# Altium PCB gateway.PcbDoc
Units mil, origin at the board's own origin, x right, y up, seen from the top; angles counter-clockwise.
Board outline 6000 x 4000 mil, 2 copper layers (Top Layer, Bottom Layer); 114 components, 94 nets, 405 pads, 209 vias.
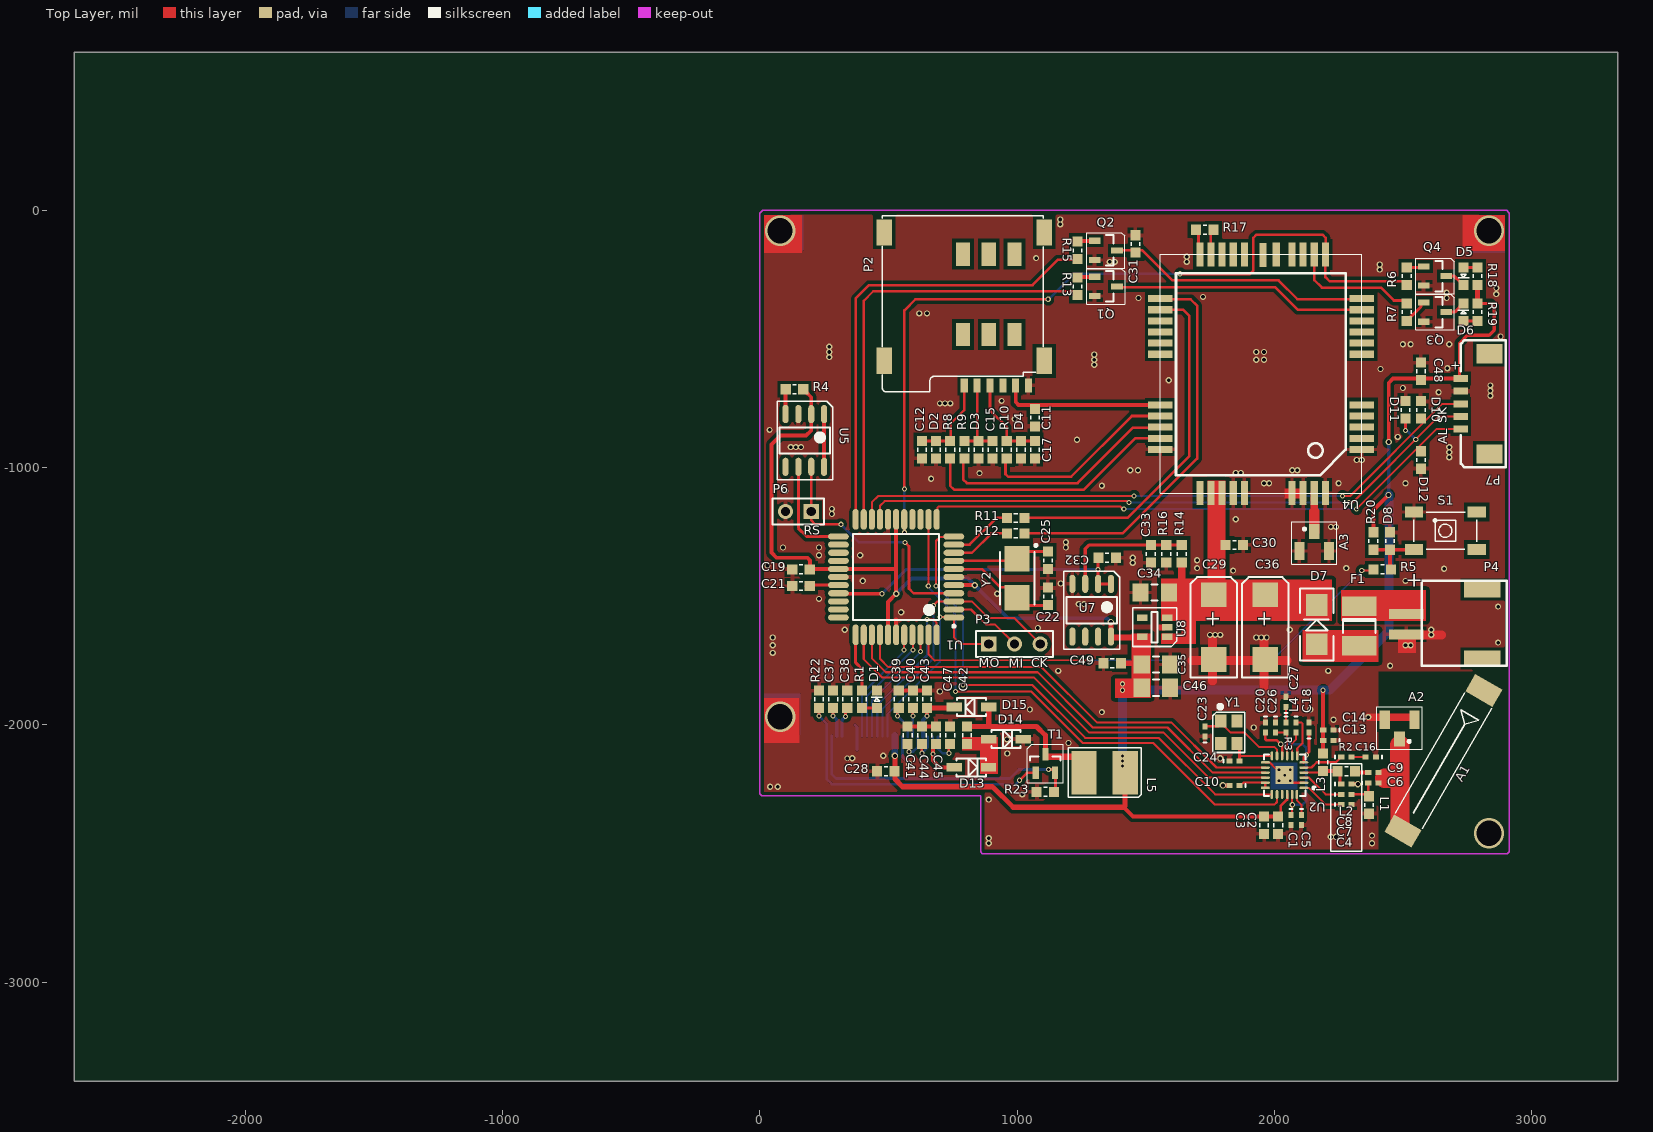
[diagram p0: Top Layer view]
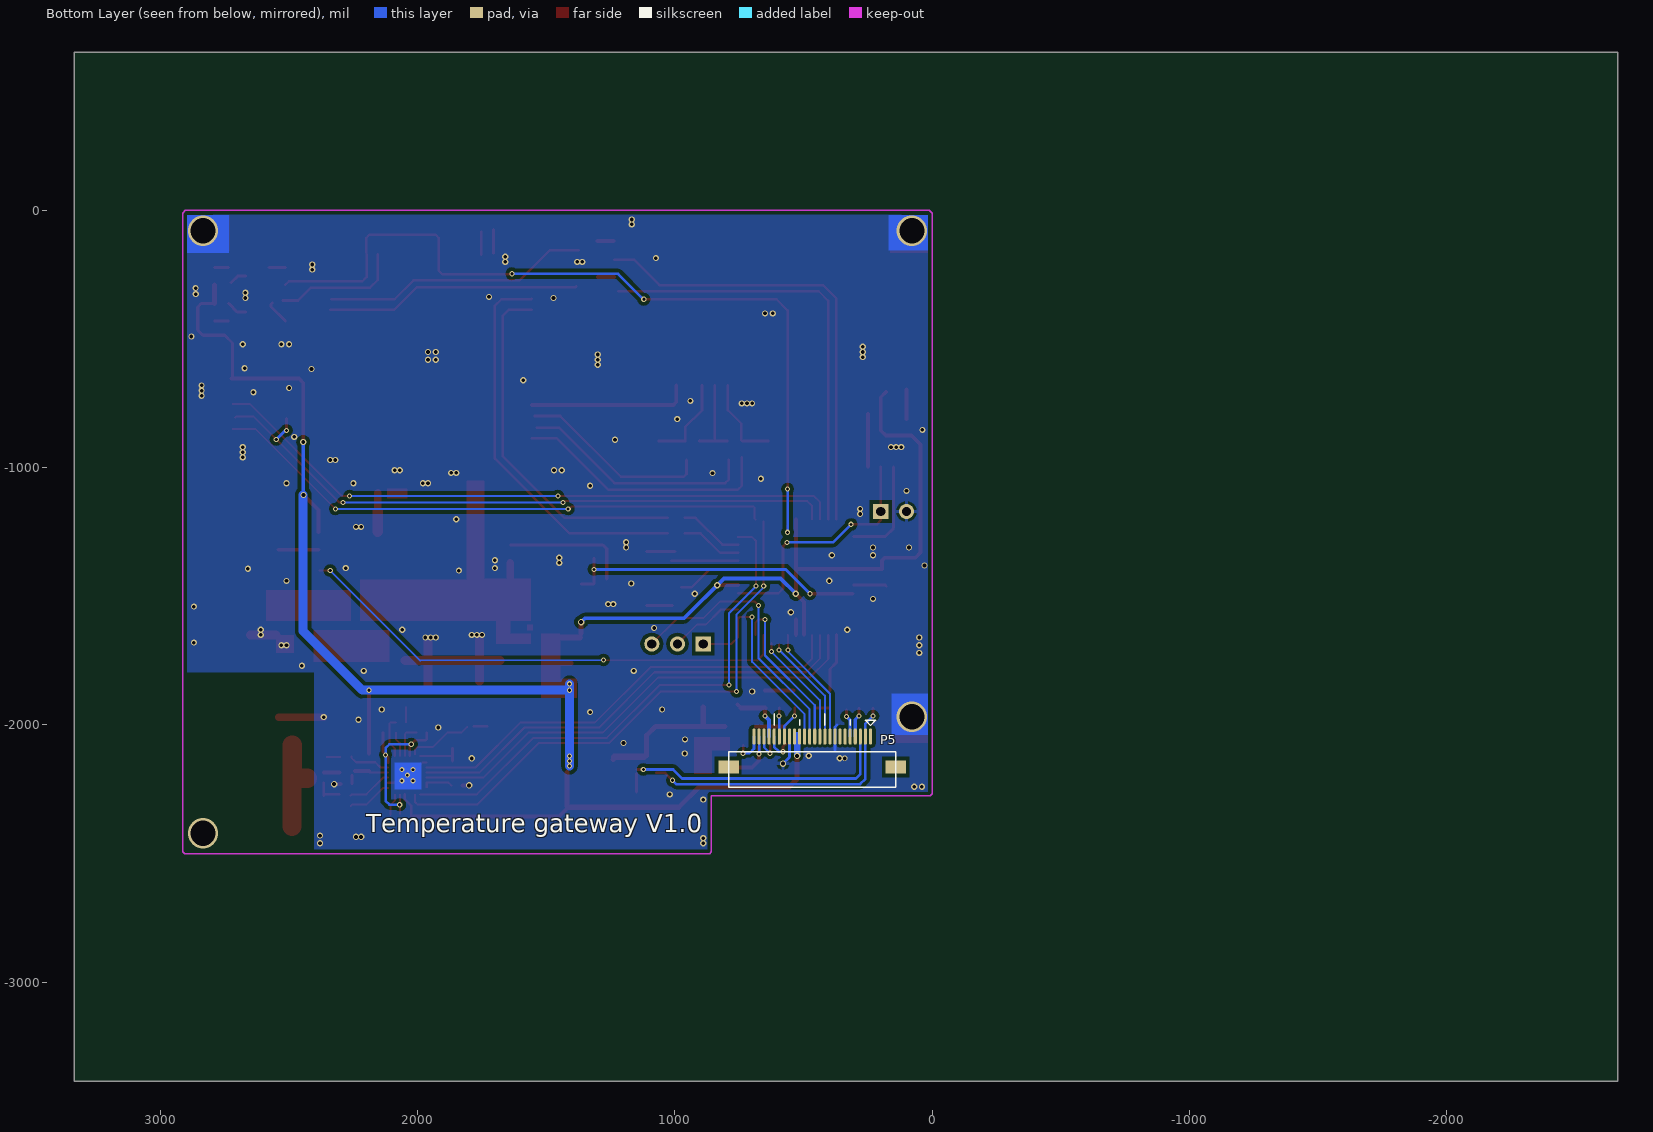
[diagram p1: Bottom Layer view, seen from below]

## Layer stack, top to bottom
Top Solder: solder mask 0.4, Solder Resist, Dk 3.5
Top Layer: signal copper 1.4
Dielectric1: dielectric 12.6, FR-4, Dk 4.8
Bottom Layer: signal copper 1.4
Bottom Solder: solder mask 0.4, Solder Resist, Dk 3.5

## Board outline
-2665,-3385 3335,-3385 3335,615 -2665,615

## Design rules (kind name [scope] priority, off if disabled: settings)
Clearance [All] p1 off: gap=12
ComponentClearance [All] p1 off: gap=10 collisioncheckmode=3 verticalgap=10 showdistances=FALSE
FabricationTestPointUsage TestPointUsage [All] p1: valid=0 allowmultiple=FALSE
FabricationTestpoint Testpoint [(IsPad And (OnTopLayer Or OnBottomLayer))] p1: side=3 testpointundercomponent=TRUE minsize=40 maxsize=100 preferedsize=60 minholesize=0 maxholesize=40 preferedholesize=32 testpointgrid=1 allowsidetop=TRUE allowsidebottom=TRUE usegrid=TRUE gridtolerance=0.01
HoleSize [All] p1: absolutevalues=TRUE maxlimit=200 minlimit=1 maxpercent=80.000 minpercent=20.000
PolygonConnect [All] p1: connectstyle=Relief reliefconductorwidth=15 reliefentries=4 polygonreliefangle="90 Angle" airgapwidth=10
RoutingVias [All] p1: holewidth=28 width=50 viastyle="Through Hole" minholewidth=10 minwidth=20 maxholewidth=200 maxwidth=300
SolderMaskExpansion [All] p1: expansion=4
Width [All] p1: maxlimit=200 minlimit=8 preferedwidth=12 minimp=50.000000 maximp=50.000000 favimp=50.000000
26 further rules are at their usual default settings.

## Components (designator, comment, footprint, x,y, rotation, side; value= is the part's Value field where it differs from the comment)
A1 "ANTA" ANTA-433 2500,-2412 r60 top
A2 "ANTA" IPEX 2487,-2008 r270 top
A3 "IPEX" IPEX 2155,-1295 r90 top
C1 "Cap" 0402-A 2065,-2370 r270 top
C2 "Cap" 0603 2015,-2390 r270 top
C3 "Cap" 0603 1960,-2390 r270 top
C4 "Cap" 0402-A 2280,-2310 r0 top
C5 "Cap" 0402-A 2105,-2370 r270 top
C6 "Cap" 0402-A 2385,-2225 r0 top
C7 "Cap" 0402-A 2280,-2270 r0 top
C8 "Cap" 0402-A 2280,-2230 r0 top
C9 "Cap" 0402-A 2385,-2185 r0 top
C10 "Cap" 0402-A 1845,-2235 r180 top
C11 "Cap" 0603 1070,-805 r90 top
C12 "Cap" 0603 630,-930 r90 top
C13 "Cap" 0402-A 2210,-2060 r180 top
C14 "Cap" 0402-A 2210,-2020 r180 top
C15 "Cap" 0603 905,-930 r270 top
C16 "Cap" 0402-A 2375,-2125 r180 top
C17 "Cap" 0603 1070,-930 r270 top
C18 "Cap" 0402-A 2135,-2010 r90 top
C19 "Cap" 0603 160,-1395 r180 top
C20 "Cap" 0402-A 1965,-2010 r270 top
C21 "Cap" 0603 160,-1460 r180 top
C22 "Cap" 0603 1120,-1500 r90 top
C23 "Cap" 0402-A 1730,-2025 r90 top
C24 "Cap" 0402-A 1845,-2140 r0 top
C25 "Cap" 0603 1120,-1360 r270 top
C26 "Cap" 0402-A 2005,-2010 r270 top
C27 "Cap" 0402-A 2045,-1910 r90 top
C28 "Cap" 0603 490,-2180 r0 top
C29 "Cap Pol3" C7343 1765,-1620 r270 top
C30 "Cap" 0603 1845,-1300 r180 top
C31 "Cap" 0603 1460,-130 r90 top
C32 "Cap" 0603 1350,-1350 r180 top
C33 "Cap" 0603 1520,-1335 r270 top
C34 "Cap" 3216[1206] 1535,-1485 r180 top
C35 "Cap" 3216[1206] 1540,-1765 r0 top
C36 "Cap Pol3" C7343 1965,-1620 r270 top
C37 "Cap" 0603 285,-1900 r270 top
C38 "Cap" 0603 340,-1900 r270 top
C39 "Cap" 0603 540,-1900 r270 top
C40 "Cap" 0603 595,-1900 r270 top
C41 "Cap" 0603 574.65,-2040 r270 top
C42 "Cap" 0603 805,-2040 r270 top
C43 "Cap" 0603 650,-1900 r270 top
C44 "Cap" 0603 630,-2040 r270 top
C45 "Cap" 0603 685,-2040 r270 top
C46 "Cap" 3216[1206] 1540,-1855 r0 top
C47 "Cap" 0603 740,-2040 r270 top
C48 "Cap" 0603 2570,-625 r270 top
C49 "Cap" 0603 1370,-1760 r180 top
D1 "TEST" 0603-LED 455,-1900 r90 top
D2 "RL0603E012M100K" 0603 685,-930 r270 top
D3 "RL0603E012M100K" 0603 850,-930 r270 top
D4 "RL0603E012M100K" 0603 1015,-930 r270 top
D5 "WORK" 0603-LED 2735,-255 r270 top
D6 "LINK" 0603-LED 2735,-395 r90 top
D7 "SS54" SMA 2165,-1610 r90 top
D8 "RL0603E012M100K" 0603 2450,-1285 r90 top
D10 "RL0603E012M100K" 0603 2570,-775 r90 top
D11 "RL0603E012M100K" 0603 2510,-775 r90 top
D12 "RL0603E012M100K" 0603 2570,-970 r270 top
D13 "MBR0503" SOD-123 755,-2165 r90 top
D14 "MBR0503" SOD-123 890,-2055 r90 top
D15 "MBR0503" SOD-123 890,-1930 r270 top
F1 "Fuse Thermal" 1812 2330,-1615 r270 top
L1 "Inductor" 0603 2368,-2311 r270 top
L2 "Inductor" 0603 2280,-2180 r0 top
L3 "Inductor" 0603 2190,-2145 r90 top
L4 "Inductor" 0402-A 2085,-2010 r270 top
L5 "Inductor" L-CD43 1340,-2185 r180 top
P2 "MircoSIM" "MICRO SIM" 990,-170 r180 top
P3 "Header 3" HDR1X3 890,-1685 r0 top
P4 "POW" HY2.0-2P 2513,-1569 r270 top
P5 "Header 24" FPC-24 240,-2045 r180 bottom locked
P6 "Header 2" HDR1X2 200,-1170 r180 top
P7 "TEMP" 1.25-5P 2725,-850 r90 top
Q1 "NPN" SOT-23-NPN 1345,-295 r270 top
Q2 "NPN" SOT-23-NPN 1345,-155 r270 top
Q3 "NPN" SOT-23-NPN 2625,-255 r270 top
Q4 "NPN" SOT-23-NPN 2625,-395 r270 top
R1 "Res1" 0603 397.48,-1900 r270 top
R2 "Res1" 0402-A 2280,-2125 r0 top
R3 "Res1" 0402-A 2045,-2010 r270 top
R4 "Res1" 0603 135,-695 r0 top
R5 "Res1" 0603 2420,-1395 r180 top
R6 "Res1" 0603 2515,-255 r90 top
R7 "Res1" 0603 2515,-395 r270 top
R8 "Res1" 0603 740,-930 r270 top
R9 "Res1" 0603 795,-930 r270 top
R10 "Res1" 0603 960,-930 r270 top
R11 "Res1" 0603 995,-1195 r180 top
R12 "Res1" 0603 995,-1255 r180 top
R13 "Res1" 0603 1235,-295 r270 top
R14 "Res1" 0603 1640,-1335 r270 top
R15 "Res1" 0603 1235,-155 r270 top
R16 "Res1" 0603 1580,-1335 r90 top
R17 "Res1" 0603 1730,-75 r0 top
R18 "Res1" 0603 2790,-255 r90 top
R19 "Res1" 0603 2790,-395 r270 top
R20 "Res1" 0603 2385,-1285 r270 top
R22 "Res1" 0603 230,-1900 r90 top
R23 "Res1" 0603 1110,-2260 r180 top
S1 "SW-PB" SW1 2665,-1245 r0 top
T1 "Si1304" SOT-23-NMOS 1110,-2150 r90 top
U1 "ATmega16" 44A_M 530,-1425 r180 top
U2 "A7139" QFN24N 2040,-2195 r180 top
U4 "G3524" G3524 1925,-870 r180 top
U5 "IMP706" SOIC8 175,-895 r270 top
U7 "LM358D" SOIC8 1290,-1555 r270 top
U8 "XC6219B30" SOT23-5N 1535,-1620 r180 top
Y1 "12.8M" XT3225 1855,-1985 r270 top
Y2 "XTAL" XT5032 1000,-1430 r270 top

## Footprints (in the part's own frame and the unit in brackets; to place one, negate y for a bottom-side part, rotate by r counter-clockwise, add the part's x,y. Pads: shape width x height; smd on the part's side, far side on the other; paste and mask are expansions set on the pad)
1.25-5P [mm]
  rect 1.9x2.6 smd: 0(-2.45,-2.835) 0(7.45,-2.835)
  rect 0.7x1.4 smd: 1(0,0) 2(1.25,0) 3(2.5,0) 4(3.75,0) 5(5,0)
  silkscreen extent -3.78,-4.44 8.79,0
44A_M [mm] "44-Pin Thin Quad Flat Pack 0.8 mm Pitch, IPC Low Density"
  oval 2.05x0.6 smd: 1(-5.7,4) 2(-5.7,3.2) 3(-5.7,2.4) 4(-5.7,1.6) 5(-5.7,0.8) 6(-5.7,0) 7(-5.7,-0.8) 8(-5.7,-1.6) 9(-5.7,-2.4) 10(-5.7,-3.2) 11(-5.7,-4) 23(5.7,-4) 24(5.7,-3.2) 25(5.7,-2.4) 26(5.7,-1.6) 27(5.7,-0.8) 28(5.7,0) 29(5.7,0.8) 30(5.7,1.6) 31(5.7,2.4) 32(5.7,3.2) 33(5.7,4)
  oval 0.6x2.05 smd: 12(-4,-5.7) 13(-3.2,-5.7) 14(-2.4,-5.7) 15(-1.6,-5.7) 16(-0.8,-5.7) 17(0,-5.7) 18(0.8,-5.7) 19(1.6,-5.7) 20(2.4,-5.7) 21(3.2,-5.7) 22(4,-5.7) 34(4,5.7) 35(3.2,5.7) 36(2.4,5.7) 37(1.6,5.7) 38(0.8,5.7) 39(0,5.7) 40(-0.8,5.7) 41(-1.6,5.7) 42(-2.4,5.7) 43(-3.2,5.7) 44(-4,5.7)
  silkscreen extent -5.82,-4.25 4.25,4.97, body extent -5,-5 5,5, height 1.2
0402-A [mm] "Chip Inductor; Body 1 x 0.5 mm (LxW typ)"
  rect 0.6x0.5 smd: 1(-0.5,0) 2(0.5,0)
  silkscreen extent -1.1,-0.15 -1.1,0.15
0603 [mm]
  rect 1x1 smd: 1(-0.864,0) 2(0.864,0)
  silkscreen extent -0.18,-0.43 0.18,0.43
0603-LED [mm]
  rect 1x1 smd: 1(-0.864,0) 2(0.864,0)
  silkscreen extent -0.18,-0.51 0.18,0.56
1812 [mm] "Chip Capacitor; Body 4.5 x 3.2 mm (LxW typ)"
  rect 1.9x3.4 smd: 1(-1.95,0) 2(1.95,0)
  silkscreen extent -0.7,-1.6 0.7,1.6
3216[1206] [mm] "Chip Resistor; Body 3.2 x 1.6 mm (LxW typ)"
  rect 1.6x1.8 smd: 1(-1.4,0) 2(1.4,0)
  silkscreen extent -0.3,-0.8 0.3,0.8
ANTA-433 [mm]
  rect 2x3.1 smd: 1(0,0) 2(16,0)
  silkscreen extent 1.14,-1.52 14.86,1.52
C7343 [mm] "Molded Capacitor, 2-Leads, Body 7.3x4.3mm, IPC Medium Density"
  rect 2.45x2.5 smd: 1(-3.2,0) 2(3.2,0)
  silkscreen extent -4.95,-2.29 4.95,2.29, body extent -3.75,-2.25 3.75,2.25, height 4.3
FPC-24 [mm]
  rect 2x1.3 smd: 0(-14,-3) 0(2.5,-3)
  oval 0.3x1.6 smd: 1(0,0) 2(-0.5,0) 3(-1,0) 4(-1.5,0) 5(-2,0) 6(-2.5,0) 7(-3,0) 8(-3.5,0) 9(-4,0) 10(-4.5,0) 11(-5,0) 12(-5.5,0) 13(-6,0) 14(-6.5,0) 15(-7,0) 16(-7.5,0) 17(-8,0) 18(-8.5,0) 19(-9,0) 20(-9.5,0) 21(-10,0) 22(-10.5,0) 23(-11,0) 24(-11.5,0)
  silkscreen extent -14,-5 2.5,2.23
G3524 [mm]
  rect 2.4x0.7 smd: 1(-10.55,1.5) 2(-10.55,0.4) 3(-10.55,-0.7) 4(-10.55,-1.8) 5(-10.55,-2.9) 6(-10.55,-7.9) 7(-10.55,-9) 8(-10.55,-10.1) 9(-10.55,-11.2) 10(-10.55,-12.3) 11(-10.55,-13.4) 21(9.35,-13.4) 22(9.35,-12.3) 23(9.35,-11.2) 24(9.35,-10.1) 25(9.35,-9) 26(9.35,-7.9) 27(9.35,-2.9) 28(9.35,-1.8) 29(9.35,-0.7) 30(9.35,0.4) 31(9.35,1.5)
  rect 0.7x2.4 smd: 12(-6.95,-17.75) 13(-5.85,-17.75) 14(-4.75,-17.75) 15(-3.65,-17.75) 16(1.05,-17.75) 17(2.15,-17.75) 18(3.25,-17.75) 19(4.35,-17.75) 20(5.45,-17.75) 32(5.45,5.8) 33(4.35,5.8) 34(3.25,5.8) 35(2.15,5.8) 36(1.05,5.8) 37(-3.65,5.8) 38(-4.75,5.8) 39(-5.85,5.8) 40(-6.95,5.8) 41(-2.1,-17.75) 42(-0.8,-17.7)
  silkscreen extent -10.55,-17.8 9.35,5.8
HDR1X2 [mm] "Connector; Header; 2 Position"
  rect 1.5x1.5 hole 0.9: 1(0,0)
  round 1.5 hole 0.9: 2(2.54,0)
  silkscreen extent -1.27,-1.27 3.81,1.27
HDR1X3 [mm] "Connector; Header; 3 Position"
  rect 1.5x1.5 hole 0.9: 1(0,0)
  round 1.5 hole 0.9: 2(2.54,0) 3(5.08,0)
  silkscreen extent -1.27,-1.27 6.35,1.27
HY2.0-2P [mm]
  rect 1.5x3.6 smd: 0(-2.413,7.493) 0(4.369,7.493)
  rect 1x3.4 smd: 1(0,0) 2(2,0)
  silkscreen extent -3.3,1.52 5.08,9.91
IPEX [mil] "SOT23, 3-Leads, Body 3.0x2.6mm (max), Pitch 0.95mm, IPC Medium Density"
  rect 59.06x41.34 smd: 1(46.5,-0.5)
  rect 70.87x39.37 smd: 2(-28.5,57.5) 3(-28.5,-57.5)
  silkscreen extent -80,-89 86,88
L-CD43 [mm]
  rect 2.5x4.3 smd: 1(-2.032,0) 2(2.032,0)
  silkscreen extent -3.61,-2.44 3.58,2.44
"MICRO SIM" [mm]
  rect 1.55x2.6 smd: 0(-2.95,10.53) 0(-2.95,-2.15) 0(12.85,10.53) 0(12.85,-2.15)
  rect 1.4x2.3 smd: 0(0,7.92) 0(0,0) 0(2.54,7.92) 0(2.54,0) 0(5.08,7.92) 0(5.08,0)
  rect 0.7x1.35 smd: 1(-0.12,12.955) 2(2.42,12.955) 3(4.96,12.955) 5(-1.39,12.955) 6(1.15,12.955) 7(3.69,12.955)
  silkscreen extent -2.82,-3.82 13.05,13.58
QFN24N [mm] "QFN, 24-Leads, Body 4.1x4.1mm (max), Pitch 0.50mm, IPC Medium Density"
  oval 0.889x0.25 smd: 1(-1.905,1.25) 2(-1.905,0.75) 3(-1.905,0.25) 4(-1.905,-0.25) 5(-1.905,-0.75) 6(-1.905,-1.25) 13(1.905,-1.25) 14(1.905,-0.75) 15(1.905,-0.25) 16(1.905,0.25) 17(1.905,0.75) 18(1.905,1.25)
  oval 0.25x0.889 smd: 7(-1.25,-1.905) 8(-0.75,-1.905) 9(-0.25,-1.905) 10(0.25,-1.905) 11(0.75,-1.905) 12(1.25,-1.905) 19(1.25,1.905) 20(0.75,1.905) 21(0.25,1.905) 22(-0.25,1.905) 23(-0.75,1.905) 24(-1.219,1.905)
  rect 1.8x1.8 smd: 25(0,0)
  silkscreen extent -3.03,-2.05 2.05,2.05, body extent -2.05,-2.05 2.05,2.05, height 0.8
SMA [mm] "Molded Diode, 2-Leads, Body 4.3x2.7mm, IPC Medium Density"
  rect 2.15x2.15 smd: 1(-1.93,0) 2(1.93,0)
  silkscreen extent -3.56,-1.65 3.56,1.65, body extent -2.28,-1.42 2.29,1.42, height 2.95
SOD-123 [mm]
  rect 0.85x1.524 smd: 1(0,0) 2(0,-3.4)
  silkscreen extent -0.9,-3.15 0.9,-0.25
SOIC8 [mm]
  oval 1.8x0.6 smd: 1(-2.625,1.905) 2(-2.625,0.635) 3(-2.625,-0.635) 4(-2.625,-1.905) 5(2.575,-1.905) 6(2.575,-0.635) 7(2.575,0.635) 8(2.575,1.905)
  silkscreen extent -3.89,-2.74 3.84,2.77, body extent -2.03,-2.5 1.97,2.5, height 1.76
SOT23-5N [mm]
  rect 1.05x0.65 smd: 1(-1.225,0.95) 2(-1.225,0) 3(-1.225,-0.95) 4(1.225,-0.95) 5(1.225,0.95)
  silkscreen extent -2.16,-1.91 2.16,1.91, body extent -0.87,-1.5 0.88,1.5, height 1.1
SOT-23-NMOS [mm] "SOT23, 3-Leads, Body 3.0x2.6mm (max), Pitch 0.95mm, IPC Medium Density"
  rect 1.25x0.6 smd: 1(-0.925,0.95) 2(0.925,0) 3(-0.925,-0.95)
  silkscreen extent -1.91,-1.78 1.91,1.78, body extent -0.7,-1.5 0.7,1.5, height 1.1
SOT-23-NPN [mm]
  rect 0.6x1.143 smd: 1(0.95,-1.108) 2(-0.95,-1.108) 3(0,1.108)
  silkscreen extent -1.75,-1.89 1.75,1.87, body extent -1.5,-0.66 1.5,0.74, height 1.1
SW1 [mm]
  rect 1.8x1.1 smd: 1(-3.1,1.85) 2(-3.1,-1.85) 3(3.1,-1.85) 4(3.1,1.85)
  silkscreen extent -3.1,-1.85 3.1,1.85
XT3225 [mm]
  rect 1.3x1.1 smd: 1(0,-1.6) 2(2.2,-1.6) 3(2.2,0) 4(0,0)
  silkscreen extent -1.6,-2.39 3.1,0.76
XT5032 [mm]
  rect 2.5x2.45 smd: 1(-1.925,0) 2(1.925,0)
  silkscreen extent -3.37,-1.7 2.6,1.97, body extent -2.58,-1.68 2.58,1.67, height 1.6

## Part data
A1 A2: library part SMB, "SMB Straight Connector"
C1 C2 C3 C4 C5 C6 C7 C8 C9 C10 C11 C12 C13 C14 C15 C16 C17 C18 C19 C20 C21 C22 C23 C24 C25 C26 C27 C28 C30 C31 C32 C33 C34 C35 C37 C38 C39 C40 C41 C42 C43 C44 C45 C46 C47 C48 C49: "Capacitor"
C29 C36: "Polarized Capacitor (Surface Mount)"
D1 D5 D6: library part LED2, "Typical RED, GREEN, YELLOW, AMBER GaAs LED"
D2 D3 D4 D8 D10 D11 D12: library part "Diode 18TQ045", "Schottky Rectifier"
D7 D13 D14 D15: library part "Diode 1N5408", "3 Amp Medium Power Silicon Rectifier Diode"
F1: "Thermal Fuse"
P3: "Header, 3-Pin"
P4: library part "Header 2", "Header, 2-Pin"
P5: "Header, 24-Pin"
P6: "Header, 2-Pin"
P7: library part "Header 5", "Header, 5-Pin"
Q1 Q2 Q3 Q4: library part 2N5551, "NPN General Purpose Amplifier"
R1 R2 R3 R4 R5 R6 R7 R8 R9 R10 R11 R12 R13 R14 R15 R16 R17 R18 R19 R20 R22 R23: "Resistor"
S1: "Switch"
T1: library part IRF644S, "HEXFET N-Channel Power MOSFET"
U1: library part ATmega16-16AI, "8-Bit AVR Microcontroller with 16K Bytes of In-System Programmable Flash Memory"
U5: library part MAX706RCSA, "+3V Voltage Monitoring, Low-Cost, 礟 Supervisory Circuit"
U7: "Dual Low-Power Operational Amplifier"
U8: library part LP5907
Y1: library part 3225-wy
Y2: "Crystal Oscillator"

## Via types
v1: diameter 24, hole 14, Top Layer to Bottom Layer, 131 vias
v2: diameter 20, hole 12, Top Layer to Bottom Layer, 49 vias
v3: diameter 25, hole 15, Top Layer to Bottom Layer, 12 vias
v4: diameter 20, hole 10, Top Layer to Bottom Layer, tented top, 5 vias
v5: diameter 118.11, hole 98.43, Top Layer to Bottom Layer, 4 vias
v6: diameter 24, hole 15, Top Layer to Bottom Layer, 3 vias
v7: diameter 25, hole 14, Top Layer to Bottom Layer, 1 vias
v8: diameter 22, hole 15, Top Layer to Bottom Layer, 1 vias
v9: diameter 25, hole 13, Top Layer to Bottom Layer, 1 vias
v10: diameter 26, hole 14, Top Layer to Bottom Layer, 1 vias
v11: diameter 26, hole 16, Top Layer to Bottom Layer, 1 vias

## Nets (pads, with @x,y where several pads share a name; then routed paths per layer and width w, separated by ;. In a path a pad name is that pad's centre, name@x,y a point inside that pad or via, vN(x,y) a via of type N, cw(c..) or ccw(c..) an arc to the next point about the centre after c; other vN are vias at no path point)
+3V: C2.1 C3.1 C13.2 C14.2 C19.1 C28.2 C35.1 C46.1 C48.2 C49.1 L3.2 L5.1 P5.15 P5.16 P7.5 R4.2 R18.1 R19.1 R20.1 U1.5 U1.17 U1.27 U1.38 U2.22 U5.2 U7.8 U8.5 | length 8567.6
  Top Layer w10: C2.1@2025,-2355 2025,-2315 2049.84,-2290.16 U2.22
  Top Layer w12: P7.5@2720,-650 2720,-515 2750,-485 2835,-485 2855,-465 2855,-375 2841,-361 R19.1
  Top Layer w15: R4.2@180,-706 200,-726 200,-855 180,-875 80,-875 45,-910 45,-1330 65,-1350 185,-1350 195,-1360 C19.1@195,-1390 ; C19.1@195.5,-1393.5 530,-1393.5 ; U1.38 498.5,-1521.5 v10(530,-1490) U1.17 ; U1.5 v9(835,-1456.5) ; 1420,-2290 1420,-2325 1451,-2356 C2.1 ; L3.2 v2(2190,-1865) ; R20.1 2385,-1165 v6(2444.37,-1105.63) ; v6(2445,-900) 2445,-670 2461.85,-653.15 P7.5
  Top Layer w20: v11(525,-2120) 525,-2210 555,-2240 905,-2240 985,-2320 1415,-2320 1420,-2315 L5.1 ; U7.8@1365,-1645 v3(1365,-1600) ; C49.1 C35.1@1460,-1760 ; R19.1 R18.1
  Top Layer w25: U7.8@1370,-1660 1465,-1660
  Bottom Layer w15: v10(530,-1490) 590,-1430 810,-1430 965,-1585 1350,-1585 v3(1365,-1600) ; v6@2445,-1105 v6(2445,-900)
  Bottom Layer w25: v11@525,-2115 525,-2040
  Bottom Layer w35: v2(1410,-2160) v2(1410,-1840) ; v2(1410,-1865) 2215,-1865 2445,-1635 v6@2445,-1105.63
  other v2: 1410,-2140 1410,-2120
+4.2V: C29.1 C30.2 C34.1 C36.1 D7.2 R14.2 U4.33 U4.34 U8.1 U8.3 | length 101
  Top Layer w30: 1640,-1470 R14.2
ALT_116: D12.1 P7.1 U1.12 | length 2211.3
  Top Layer w8: U1.12 690,-1198.07 690,-1155 695,-1150 1400,-1150 1410,-1160 v2(1415,-1160) ; v2(2320,-1160) 2630,-850 P7.1@2720,-850
  Bottom Layer w8: v2(1415,-1160) v2(2320,-1160)
D1: R1.1 U1.34 | length 226.9
  Top Layer w12: U1.34 372.52,-1757.52 397.48,-1782.48 R1.1
DOG: U1.23 U5.6 | length 407.7
  Top Layer w12: U5.6 150,-1235 182.52,-1267.52 U1.23
E_BUSY: P5.9 U1.40 | length 463.5
  Top Layer w8: v2(560,-1708.46) 560,-1650.91 U1.40
  Bottom Layer w8: P5.9 397.48,-1877.52 560,-1715 v2(560,-1708.46)
E_CLK: P3.3 P5.13 U1.3 | length 1078.7
  Top Layer w8: v2(675,-1535) 690,-1520 743.9,-1520 U1.3@748.9,-1525 ; U1.3 824.49,-1519.49 890,-1585 990,-1585 P3.3
  Bottom Layer w8: P5.13 476.22,-1938.78 675,-1740 v2(675,-1535)
E_CS: P5.12 U1.44 | length 624.7
  Top Layer w8: v2(650,-1590) 675,-1590 687.48,-1602.48 U1.44
  Bottom Layer w8: P5.12 456.54,-1923.46 650,-1730 v2(650,-1590)
E_D/C: P5.11 U1.42 | length 441.5
  Top Layer w8: v2(625,-1715) U1.42@625,-1681.42
  Bottom Layer w8: P5.11 436.85,-1903.15 v2(625,-1715)
E_RES: P5.10 U1.41 | length 432.8
  Top Layer w8: v2(595,-1708.46) U1.41@595,-1685.91
  Bottom Layer w8: P5.10 417.17,-1886.3 v2(595,-1708.46)
E_SDI: P3.1 P5.14 U1.1 | length 840.5
  Top Layer w8: v2(700,-1580) 746.89,-1580 751.89,-1585 U1.1 754.41,-1659.41 780,-1685 865,-1685 P3.1@890,-1660
  Bottom Layer w8: P5.14 495.91,-1959.09 700,-1755 v2(700,-1580)
GDR: P5.2 R22.1 T1.1 | length 1132.4
  Top Layer w10: v2(230,-1965) R22.1 ; v2(1010,-2215) 1038.58,-2186.42 T1.1
  Bottom Layer w10: v2@230,-1960 v2(230,-1965) 259.68,-1994.68 259.68,-2209.68 280,-2230 995,-2230 v2(1010,-2215)
GIO1: U1.11 U2.19 | length 2058.4
  Top Layer w8: v2(685,-1460) 685,-1285 700,-1270 U1.11@756.89,-1270 ; v2(790,-1845) 1060,-1845 1265,-2050 1550,-2050 1770,-2270 U2.19
  Bottom Layer w8: v2(685,-1460) 790,-1565 v2(790,-1845)
GIO2: U1.13 U2.20 | length 2170.1
  Top Layer w8: v2(655,-1460) U1.13@655,-1209.61 ; v2(760,-1870) 1055,-1870 1255,-2070 1530,-2070 1769.53,-2309.53 2000.47,-2309.53 2010.47,-2299.53 U2.20
  Bottom Layer w8: v2(655,-1460) 655,-1465 760,-1570 v2(760,-1870)
GND: A2.2 A2.3 A3.2 A3.3 C1.2 C2.2 C3.2 C4.2 C5.2 C8.2 C10.2 C11.1 C12.1 C13.1 C14.1 C15.2 C16.1 C17.2 C18.2 C19.2 C20.1 C21.2 C22.2 C23.1 C24.1 C25.2 C26.1 C27.2 C28.1 C29.2 C30.1 C31.2 C32.1 C33.2 C34.2 C35.2 C36.2 C37.1 C38.1 C39.1 C40.1 C41.1 C43.1 C44.1 C45.1 C46.2 C47.1 C48.1 C49.2 D1.2 D2.2 D3.2 D4.2 D8.2 D10.2 D11.2 D12.2 D14.2 L1.2 P2.5 P4.2 P5.8 P5.17 P6.2 P7.4 Q1.1 Q2.1 Q3.1 Q4.1 R16.1 R22.2 R23.2 S1.1 U1.6 U1.18 U1.28 U1.39 U2.2 U2.13 U2.25 U4.1 U4.31 U4.35 U4.36 U4.37 U4.38 U4.40 U5.3 U7.4 U8.2 | length 1660.3
  Top Layer w8: U2.13 1981.79,-2145.79 2006,-2170 U2.25@2010,-2170
  Top Layer w9: U2.25@2040.47,-2224.53 U2.2
  Top Layer w15: C41.1 C44.1 C45.1 ; v3(1800,-2235) C10.2 ; C8.2 v3(2325,-2230)
  Top Layer w16: U1.39 530,-1590 ; C39.1 C40.1 C43.1
  Top Layer w30: v1(2365,-1969.5) A2.2@2539.5,-1969.5
  Top Layer w35: 1680,-1750 2050,-1750 ; 1760,-1830 1760,-1670 ; 1960,-1850 1960,-1670 ; P4.2@2550,-1650 2650,-1650
  Bottom Layer w12: 370,-2000 377.8,-2007.8 377.8,-2097.2 ; P5.17 554.96,-2124.96 v3(580,-2150)
  other v1: 890,-2460 2380,-2460 890,-2440 2380,-2430 890,-2290 1020,-2270 40,-2240 70,-2240 480,-2120 1200,-2070 961,-2056 1920,-2010 2230,-1980 1330,-1950 1050,-1940 2140,-1940 1160,-1790 2210,-1790 2450,-1770 50,-1720 50,-1690 2510,-1690 2530,-1690 2870,-1680 50,-1660 1930,-1660 1950,-1660 1970,-1660 1750,-1650 1770,-1650 1790,-1650 1790,-1650 2610,-1650 330,-1630 2060,-1630 2610,-1630 1081,-1623 2870,-1540 1240,-1530 1260,-1530 230,-1510 1170,-1450 2510,-1440 1840,-1400 2660,-1393 1700,-1390 2280,-1390 30,-1380 1450,-1370 1700,-1360 1450,-1350 230,-1340 90,-1310 230,-1310 1190,-1310 1190,-1290 2220,-1230 2240,-1230 1850,-1200 280,-1180 280,-1160 100,-1090 1330,-1070 1960,-1060 1980,-1060 2250,-1060 2510,-1060 666,-1043 854,-1021 1850,-1020 1870,-1020 1440,-1010 1470,-1010 2070,-1010 2090,-1010 2320,-970 2340,-970 2680,-960 2680,-940 120,-920 140,-920 160,-920 2680,-920 1233,-891 2480,-880 38,-853 991,-811 700,-750 720,-750 740,-750 940,-740 2840,-720 2638.69,-706.47 2840,-700 2500,-690 2840,-680 1590,-660 2413,-616 2673,-613 1300,-600 1300,-580 1930,-580 1960,-580 270,-570 1300,-560 270,-550 1930,-550 1960,-550 270,-530 2500,-520 2530,-520 2680,-520 2880,-490 620,-400 650,-400 1472,-340 2670,-340 1723,-336 2863,-325 2670,-320 2863.57,-301.85 2410,-230 2410,-210 1360,-200 1380,-200 1660,-200 1074,-185 1660,-180 1168,-54 1168,-35
  other v3: 2220,-2435 2240,-2435 1790,-2130 700,-1870 549,-1562 923.23,-1490 400,-1440 390,-1340
  other v4: 2018.35,-2216.65 2061.65,-2216.65 2040,-2195 2018.35,-2173.35 2061.65,-2173.35
  other v5: 78.74,-1968.5 78.74,-78.74 2834.65,-78.74
  other v6: 962,-2111
  other v7: 360,-2130
  other v8: 340,-2130
GSM_PW: R13.2 U1.21 | length 1680.9
  Top Layer w10: U1.21 404.02,-350.98 441,-314 R13.2@1220,-314
GSM_RST: R15.2 U1.22 | length 1783.9
  Top Layer w10: U1.22 372.52,-342.48 425,-290 1060,-290 1158,-192 R15.2@1236,-192
GSM_RX: R12.2 U1.9 | length 237.9
  Top Layer w10: U1.9 824.49,-1330.51 900,-1255 R12.2
GSM_TX: R11.2 U1.10 | length 249.7
  Top Layer w10: U1.10 815.98,-1299.02 920,-1195 R11.2
HLT_CTL: P5.1
LINK_LED: Q4.2 R7.2 | length 93.9
  Top Layer w12: R7.2 2570,-374 2570,-365 Q4.2@2565,-360
MISO: P3.2 U1.2 | length 291.1
  Top Layer w8: U1.2 820.98,-1550.98 880,-1610 915,-1610 P3.2
NetA1_1: A1.1 A2.1 C6.2 C9.2 | length 382.3
  Top Layer w74.8: 2428.31,-2207 2488,-2207 A2.1@2488,-2078 ; 2473,-2207 2489,-2223 A1.1@2489,-2394
NetA3_1: A3.1 U4.39 | length 150.2
  Top Layer w30: 2155.31,-1170 U4.39
  Top Layer w40: 2155.31,-1170 2155.31,-1248.32 A3.1
NetC4_1: C4.1 U2.1 | length 174.6
  Top Layer w8: U2.1 2134.21,-2244.21 2200,-2310 2255.31,-2310 C4.1@2260.31,-2315
NetC5_1: C5.1 U2.24 | length 87.4
  Top Layer w8: U2.24 2088,-2293 2105,-2310 C5.1
NetC6_1: C6.1 C7.2 L1.1 | length 106.3
  Top Layer w10: C7.2@2304.69,-2270 L1.1@2361,-2270 ; L1.1@2365,-2275 C6.1@2365,-2225
NetC7_1: C7.1 U2.3 | length 174.4
  Top Layer w8: U2.3 2134.84,-2204.84 2200,-2270 2255.31,-2270 C7.1@2260.31,-2275
NetC8_1: C8.1 L2.1 L3.1 U2.4 | length 165.7
  Top Layer w8: U2.4 L3.1@2190,-2185.16
  Top Layer w12: C8.1@2255.31,-2230 L2.1@2255.31,-2194.32
  Top Layer w15: L3.1 L2.1@2245,-2179
NetC9_1: C9.1 L2.2 | length 61.3
  Top Layer w15: L2.2@2304,-2185 C9.1
NetC10_1: C10.1 U2.17 U2.18 | length 99.7
  Top Layer w8: C10.1@1869.69,-2235 1880.16,-2224.53 U2.17
NetC16_2: C16.2 R2.2 | length 55.6
  Top Layer w8: R2.2 C16.2
NetC21_1: C21.1 U1.29 | length 128
  Top Layer w10: C21.1@179,-1460 C21.1@182.5,-1456.5
  Top Layer w12: C21.1@182.5,-1456.5 U1.29
NetC22_1: C22.1 U1.7 Y2.2 | length 327.5
  Top Layer w10: U1.7@777.28,-1395 778.28,-1394 864,-1394 935,-1465 Y2.2@975,-1465
  Top Layer w12: Y2.2@1010,-1535 C22.1@1110,-1535
NetC23_2: C23.2 U2.11 Y1.1 | length 310.4
  Top Layer w8: Y1.1@1807.5,-2007.5 1830,-2030 1885,-2030 1940,-2085 2000,-2085 2010,-2095 U2.11@2010,-2114.29
  Top Layer w10: C23.2 Y1.1@1782.32,-2005.31
NetC24_2: C24.2 U2.12 Y1.3 | length 176.1
  Top Layer w8: 1864.69,-2120 U2.12
  Top Layer w10: C24.2 1864.69,-2120 Y1.3@1864.69,-2090
NetC25_1: C25.1 U1.8 Y2.1 | length 370
  Top Layer w10: U1.8@754,-1362 Y2.1@1014,-1362
  Top Layer w12: Y2.1@1000,-1325 C25.1@1110,-1325
NetC26_2: C26.2 R3.2 U2.9 | length 125.5
  Top Layer w8: C26.2 R3.2 ; U2.9 R3.2@2049.84,-2034.53
NetC27_1: C27.1 R3.1 | length 60.6
  Top Layer w8: R3.1 C27.1
NetC31_1: C31.1 Q2.3 U4.11 | length 1040.1
  Top Layer w10: Q2.3@1373.64,-155 1487,-155 1604,-272 2017,-272 2090,-345 U4.11@2335,-345
NetC33_1: C33.1 R14.1 R16.2 U7.3 | length 497.4
  Top Layer w12: U7.3@1265,-1431.64 1265,-1315 1279,-1301 C33.1 R16.2 R14.1
NetC39_2: C39.2 P5.18 | length 127.4
  Top Layer w10: v2(535,-1965) C39.2@535,-1934
  Bottom Layer w10: v2(535,-1965) 574.65,-2004.65 P5.18
NetC42_1: C42.1 D15.1 L5.2 T1.2 | length 604.7
  Top Layer w20: C42.1 1076,-2006 1110,-2040 T1.2@1110,-2120 ; 890,-2000 D15.1 ; L5.2@1226.42,-2120 L5.2@1240,-2133.58
  Top Layer w25: T1.2@1119.58,-2123 L5.2@1236,-2123
NetC42_2: C42.2 D13.2 D14.1
NetD1_1: D1.1 R1.2 | length 57.5
  Top Layer w10: R1.2 D1.1
NetD5_1: D5.1 R18.2 | length 55
  Top Layer w12: D5.1 R18.2
NetD5_2: D5.2 Q3.3 | length 66.7
  Top Layer w12: Q3.3 2700,-255 D5.2@2725,-280
NetD6_1: D6.1 R19.2 | length 55
  Top Layer w12: D6.1 R19.2
NetD6_2: D6.2 Q4.3 | length 80.4
  Top Layer w12: Q4.3 2701,-395 D6.2
NetD7_1: D7.1 F1.2
NetD8_1: D8.1 R5.1 R20.2 S1.2 | length 230.4
  Top Layer w8: S1.2@2541.79,-1319 S1.2
  Top Layer w15: R20.2 D8.1 ; R5.1@2450,-1391 D8.1 ; S1.2@2541.79,-1319 D8.1
NetL4_1: L4.1 U2.7 | length 160.6
  Top Layer w8: L4.1 2105.31,-1990.32 2110,-1995 2110,-2070 2089.21,-2090.79 U2.7
NetL4_2: L4.2 U2.8 | length 96.7
  Top Layer w8: U2.8 2069.53,-2070.47 2085,-2055 L4.2
NetQ1_2: Q1.2 R13.1 | length 63
  Top Layer w15: R13.1@1237,-258 Q1.2@1299.96,-258
NetQ1_3: Q1.3 U4.10 | length 994.9
  Top Layer w10: Q1.3@1383,-295 1387,-299 2004,-299 2090.75,-385.75 U4.10
NetQ2_2: Q2.2 R15.1 | length 63
  Top Layer w15: R15.1@1238.04,-119 Q2.2@1301,-119
NetR2_1: R2.1 U2.5 | length 163.5
  Top Layer w8: U2.5 2144.53,-2165.47 2165,-2145 2240,-2145 2257.66,-2127.34 R2.1@2257.66,-2122.34
NetR4_1: R4.1 U5.4 | length 116.4
  Top Layer w15: U5.4@100,-811.36 R4.1@100,-695
NetR7_1: R7.1 U4.13 | length 501.8
  Top Layer w10: U4.13 2155.31,-270.31 2185,-300 2415,-300 2465,-350 R7.1@2525,-350
NetR8_2: R8.2 U4.30 | length 1015.1
  Top Layer w10: R8.2@740,-960 740,-1070 755,-1085 1260,-1085 1460,-885 U4.30@1556,-885
NetR9_2: R9.2 U4.29 | length 918.7
  Top Layer w10: R9.2@790,-970 790,-1045 805,-1060 1235,-1060 1451,-844 U4.29@1538,-844
NetR10_2: R10.2 U4.28 | length 747.9
  Top Layer w10: R10.2@955,-970 955,-1025 965,-1035 1210,-1035 1446,-799 U4.28@1546,-799
NetR11_1: R11.1 U4.22 | length 1408.6
  Top Layer w10: R11.1 1430,-1195 1670,-955 1670,-410 1645.75,-385.75 U4.22
NetR12_1: R12.1 U4.21 | length 1540.6
  Top Layer w10: R12.1 1410,-1255 1700,-965 1700,-370 1675,-345 1559.45,-345 U4.21
NetR17_1: R17.1 U4.20 | length 92.2
  Top Layer w10: U4.20@1705.43,-166.18 R17.1@1705.43,-74
NetU5_1: U5.1 U5.8 | length 204.7
  Top Layer w15: U5.8 U5.1
PREVGH: C43.2 D15.2 P5.21 | length 229.7
  Top Layer w15: v2(650,-1965) C43.2 ; D15.2@742.14,-1934 D15.2@756.14,-1920
  Top Layer w20: C43.2 D15.2@742.14,-1934
  Bottom Layer w15: P5.21 633.7,-1981.3 v2(650,-1965)
PREVGL: C45.2 D13.1 P5.23 | length 208.3
  Top Layer w15: C45.2@673.07,-2085.93 673.07,-2138.07 700,-2165 D13.1@750,-2165
  Bottom Layer w10: v2(673.07,-2113.07) P5.23
RESE: P5.3 R23.1 T1.3 | length 1110
  Top Layer w10: v2@1122,-2173 T1.3@1147.4,-2173
  Top Layer w12: R23.1@1149,-2260 T1.3@1149,-2189.82
  Bottom Layer w10: P5.3@279,-2043 279.02,-2045 279.37,-2083 279.37,-2191.37 296,-2208 972,-2208 1007,-2173 v2@1124,-2173
  other v2: 1123,-2173
RST: P6.1 U1.4 U5.7 | length 973.2
  Top Layer w10: U5.7 200,-1205 215,-1220 v2(315,-1220) ; v2@565.5,-1291.5 580,-1306 580,-1470 597.99,-1487.99 U1.4
  Bottom Layer w10: v2(315,-1220) 385,-1290 v2@563,-1290
  other v2: 564,-1290
SCK_116: D11.1 P7.2 U1.19 | length 2545.6
  Top Layer w8: U1.19 467.01,-1147.99 485,-1130 1425,-1130 v2(1435,-1135) ; v2(2290,-1135) 2305,-1135 2640,-800 2705,-800 P7.2@2710,-805
  Top Layer w12: v2(2510,-855) D11.1
  Bottom Layer w8: v2(1435,-1135) v2(2290,-1135) ; v2(2510,-855) v2@2515,-855
  Bottom Layer w12: v2@2515,-855 v2(2550,-890)
SCK_7139: U1.36 U2.15 | length 1804.8
  Top Layer w8: U1.36 435.51,-1740.51 490,-1795 1080,-1795 1295,-2010 1585,-2010 1760.16,-2185.16 U2.15
SCS_7139: U1.37 U2.14 | length 1766
  Top Layer w8: U1.37 467.01,-1742.01 500,-1775 1095,-1775 1310,-1990 1600,-1990 1775.47,-2165.47 U2.14
SDA_116: D10.1 P7.3 U1.20 | length 2509.2
  Top Layer w8: U1.20 435.51,-1134.49 460,-1110 v2(1455,-1110) ; v2(2265,-1110) 2295,-1110 2653.43,-751.57 P7.3@2720,-751.57
  Bottom Layer w8: v2(1455,-1110) v2(2265,-1110)
SDA_7139: U1.35 U2.16 | length 1846.5
  Top Layer w8: U1.35 404.02,-1744.02 475,-1815 1065,-1815 1280,-2030 1570,-2030 1744.84,-2204.84 U2.16
SIM_CLK: C12.2 D2.1 P2.3 R8.1 | length 338.8
  Top Layer w10: R8.1@742,-893 742,-829 794.72,-776.28 P2.3
  Top Layer w12: C12.2@636,-896 R8.1
SIM_DAT: C15.1 D3.1 P2.7 R9.1 | length 321.1
  Top Layer w10: D3.1@844.72,-890.72 P2.7
  Top Layer w12: R9.1 D3.1 904,-896 C15.1@905,-895
SIM_RST: C17.1 D4.1 P2.2 R10.1 | length 346
  Top Layer w10: P2.2 894.72,-776.72 960,-842 R10.1@960,-895
  Top Layer w12: R10.1 C17.1@1064,-896
STAT: R6.1 U1.16 U4.12 | length 3205
  Top Layer w10: U1.16@561.5,-1223 561.5,-1251 v2(562,-1251) ; v2(562,-1083) 562,-388 605,-345 v2@1123,-345 ; v2@1636,-248 1904,-248 1919,-233 1919,-106 1931,-94 2187,-94 2200,-107 U4.12@2200,-162 ; U4.12 2198.62,-258.62 2215,-275 2501,-275 R6.1
  Bottom Layer w10: v2@562,-1252 v2@562,-1081 ; v2@1121.5,-345.5 1221,-246 v2@1633,-246
  other v2: 1121,-345 1634,-246
SW1: R5.2 U1.43 | length 1956.5
  Top Layer w8: U1.43 655.98,-1725.98 680,-1750 v2(1277.59,-1746.94) ; v2(2340,-1400) R5.2@2381,-1400
  Bottom Layer w8: v2(1277.59,-1746.94) 1990,-1750 v2(2340,-1400)
TSCL: P5.6
TSDA: P5.7
VCOM: C47.2 P5.24 | length 127.6
  Top Layer w10: v2(735,-2110) C47.2@735,-2079
  Bottom Layer w10: P5.24 692.76,-2091.81 710.94,-2110 v2(735,-2110)
VDA: C1.1 C18.1 C20.2 U2.6 U2.10 U2.23 | length 713.3
  Top Layer w8: C1.1@2069.53,-2345.79 U2.23
  Top Layer w10: C20.2 1965,-2055 1970,-2060 2010,-2060 2030.16,-2080.16 U2.10 ; U2.6 2115,-2125 2135,-2105 C18.1
  Bottom Layer w10: v2(2025,-2075) 2110,-2075 2125,-2090 2125,-2295 2110,-2310 v2(2070,-2310)
  other v2: 2125,-2116.27
VDD3.0: R17.2 U4.19 | length 89.2
  Top Layer w10: U4.19 R17.2@1753.74,-82
VGH: C38.2 P5.5 | length 109.2
  Top Layer w12: v2(332.5,-1967.5) C38.2@332.5,-1941.5
  Bottom Layer w12: P5.5 318.74,-1981.26 v2(332.5,-1967.5)
VGL: C37.2 P5.4 | length 116.8
  Top Layer w12: v2(285,-1965) C37.2
  Bottom Layer w12: v2(285,-1965) 299.06,-1979.06 P5.4
VIN: F1.1 P4.1
VPP: C40.2 P5.19 | length 111.3
  Top Layer w10: v2(595,-1965) C40.2
  Bottom Layer w10: P5.19 595,-2044.33 v2(595,-1965)
VSA: C32.2 U1.30 U7.1 U7.2 | length 1197.4
  Top Layer w12: U1.30@307.6,-1490 v2(475,-1490) ; C32.2@1315,-1351 v2(1315,-1395) U7.2 U7.1
  Bottom Layer w12: v2(475,-1490) 570,-1395 v2(1315,-1395)
VSH: C41.2 P5.20 | length 116.7
  Top Layer w10: C41.2@570,-2074 580,-2084 v2(580,-2104.06)
  Bottom Layer w10: v2(580,-2104.06) 595.97,-2104.06 614.02,-2086.01 P5.20
VSIM: C11.2 P2.1 U4.27 | length 631.4
  Top Layer w15: P2.1 994.72,-744.72 1005.83,-755.83 U4.27
VSL: C44.2 P5.22 | length 104.7
  Top Layer w10: v2(630,-2110) C44.2@630,-2080
  Bottom Layer w10: v2(630,-2110) 653.39,-2086.61 P5.22
WORK_LED: Q3.2 R6.2 | length 63
  Top Layer w12: R6.2 Q3.2@2577.96,-221
pads on no net: A1.2 P2.0 P2.6 P4.0 P5.0 P7.0 S1.3 S1.4 U1.14 U1.15 U1.24 U1.25 U1.26 U1.31 U1.32 U1.33 U2.21 U4.2 U4.3 U4.4 U4.5 U4.6 U4.7 U4.8 U4.9 U4.14 U4.15 U4.16 U4.17 U4.18 U4.23 U4.24 U4.25 U4.26 U4.32 U4.41 U4.42 U5.5 U7.5 U7.6 U7.7 U8.4 Y1.2 Y1.4
copper on no net:
  other v5: 2834.65,-2421.26

## Polygon pours and split planes (outlines as drawn)
GND on Top Layer "GND_L01_P004" (solid, remove dead copper, pour order 8): -431,217 -425,223 3124,223 3124,-2808 3155,-2839 2871,-2555 -264,-2555
GND on Bottom Layer "Bottom Layer-No Net" (solid, remove dead copper, pour order 9): 265,-2045 750,-2045 750,-2185 765,-2200 735,-2230 260,-2230
GND on Bottom Layer "GND_L02_P006" (solid, remove dead copper, pour order 10): -548,242 3099,242 3155,186 3069,100 3069,-2826 -43,-2826 -326,-2543

## Keep-outs
Keep-Out Layer:
  lines w5: 0,-2268 7.59,-2275.59 858,-2275.59 858,-2493 865,-2500 2906,-2500 2913.39,-2492.61 2913.39,-10.39 2903,0 11,0 0,-11 0,-2268

## Other copper
Top Layer:
  rectangle net GND: 1552,-1632 1575,-1609
  rectangle net GND: 2040,-1120 2120,-1080
  rectangle net GND: 2480,-1720 2550,-1650
  rectangle net GND: 2732,-158 2896,-17
  rectangle net GND: 17,-166 164,-17
  rectangle net GND: 16.82,-2070 155,-1895.31
  rectangle net NetC10_1: 1959.29,-2245 1970,-2220
  rectangle net +3V: 1445,-1895 1520,-1645
  rectangle net +4.2V: 1560,-1685 1675,-1645
  rectangle net +4.2V: 1640,-1685 1695,-1590
  rectangle net +4.2V: 1560,-1595 1745,-1430
  rectangle net VIN: 2260,-1595 2590,-1475
  rectangle net NetD7_1: 2110,-1755 2405,-1630
  rectangle net +4.2V: 1695,-1595 2225,-1435
  rectangle net +4.2V: 1740,-1510 1810,-1050
  rectangle net NetC42_2: 785,-2100 925,-2047
  rectangle net NetC42_2: 855,-2190 925,-2050
  rectangle net +3V: 1380,-1895 1510,-1820
  pour cut-out: 2404,-1792 2909,-1792 2909,-2497 2907,-2499 2404,-2499
Bottom Layer:
  rectangle net GND: 2734,-166 2897,-17
  rectangle net GND: 17,-156 169,-17
  rectangle net GND: 16.82,-2039 158,-1877.52
  rectangle net GND: 1985,-2250 2090,-2145
  pour cut-out: 2908,-1795 2403,-1795 2403,-2500 2405,-2502 2908,-2502

## Silkscreen, mask and mechanical layers (free items; w line width, h text height)
Top Overlay:
  lines w5: 2220,-2490 2340,-2490 2340,-2150 2220,-2150 2220,-2490
  text "+" at 2683.44,-631.23 h60
  text "SK" at 2683,-828 h60 r90
  text "AL" at 2684,-908 h60 r90
  text "RS" at 170,-1272 h60
  text "+" at 2511,-1482 h100
  text "MO" at 851,-1788 h60
  text "CK" at 1055,-1788 h60
  text "MI" at 968,-1789 h60
Bottom Overlay:
  text "Temperature gateway V1.0" at 2200,-2440 h120

## Text inside footprints (layer, text, board x,y; h text height)
C29: Top Overlay "+" at 1737,-1555 h59.06 r270
C36: Top Overlay "+" at 1937,-1555 h59.06 r270